# Altium PCB PCB.PcbDoc
Units mm, origin at the board's own origin, x right, y up, seen from the top; angles counter-clockwise.
Board outline 83.19 x 64.96 mm, 2 copper layers (Top Layer, Bottom Layer); 13 components, 33 nets, 346 pads, 36 vias.
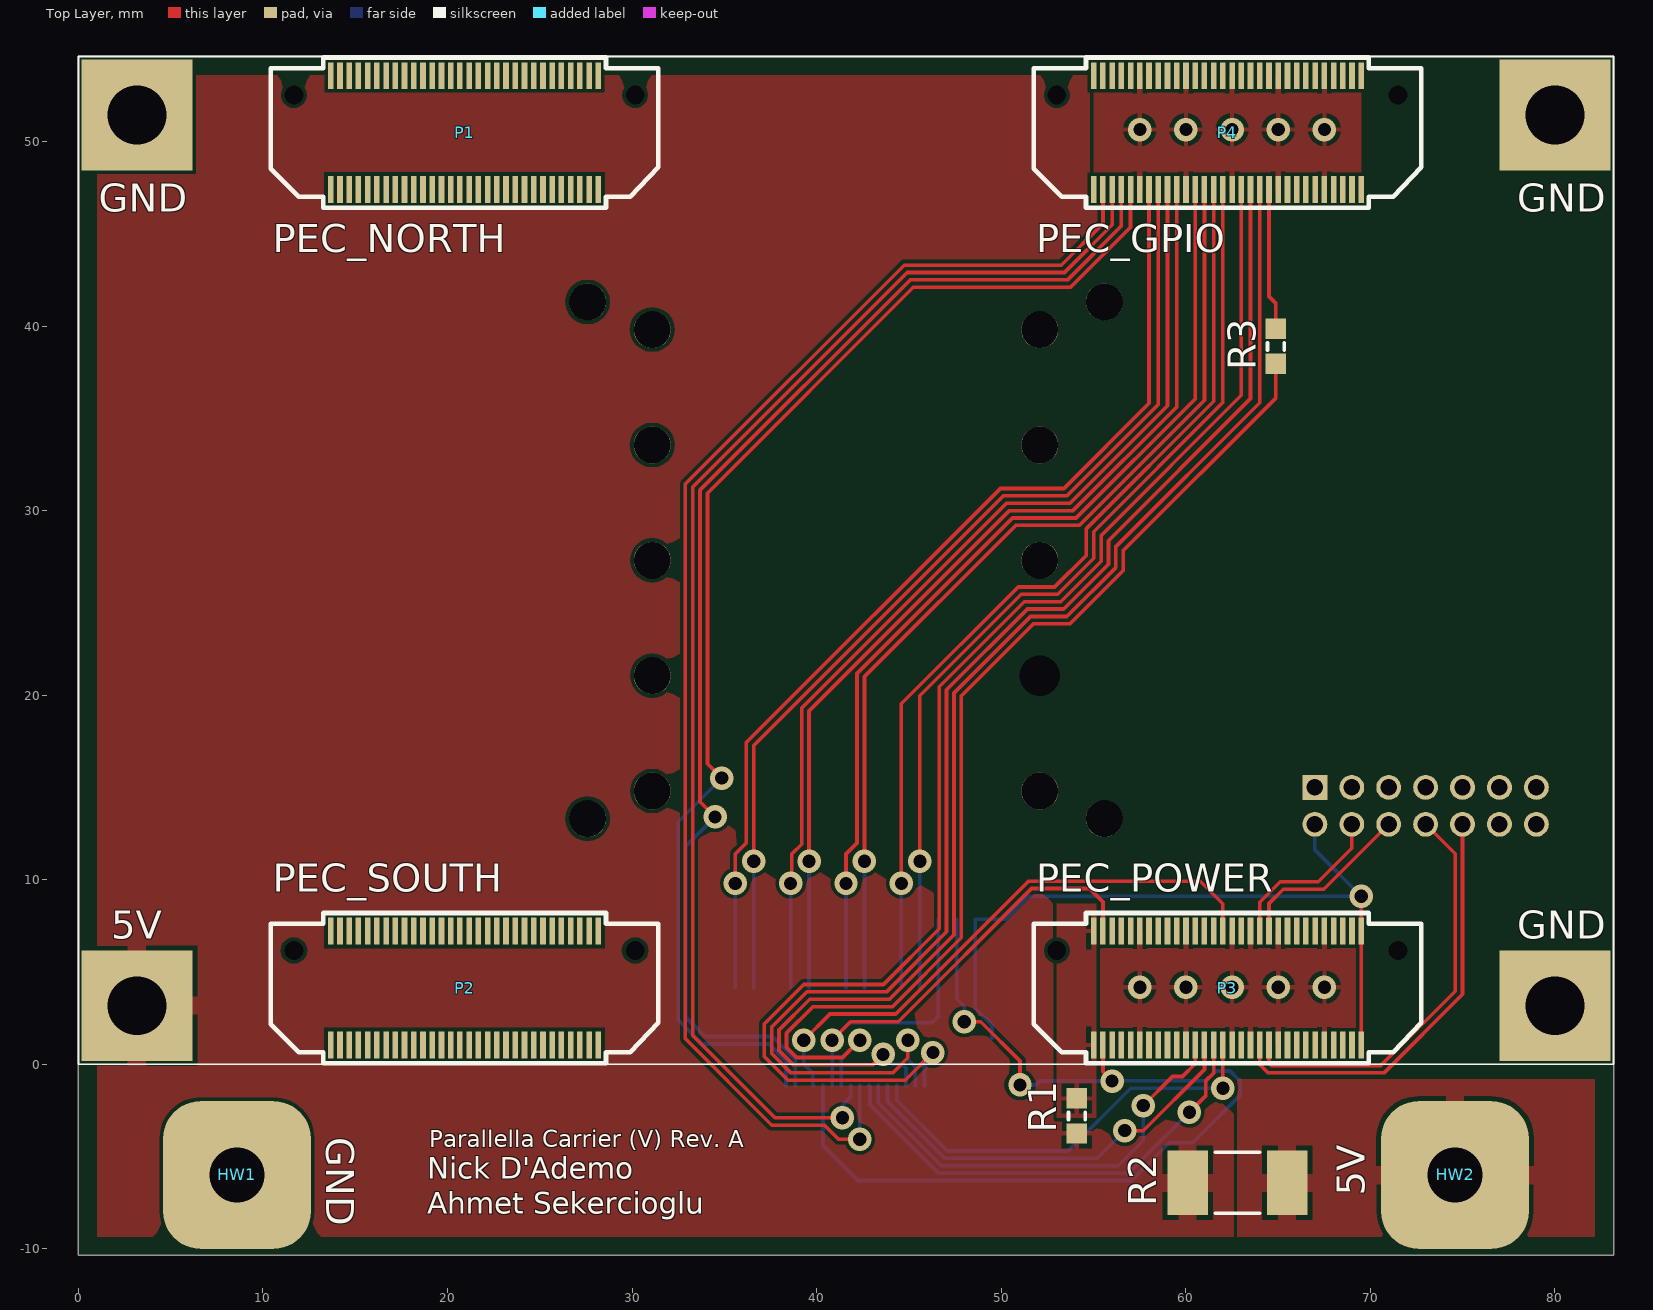
[diagram p0: Top Layer view]
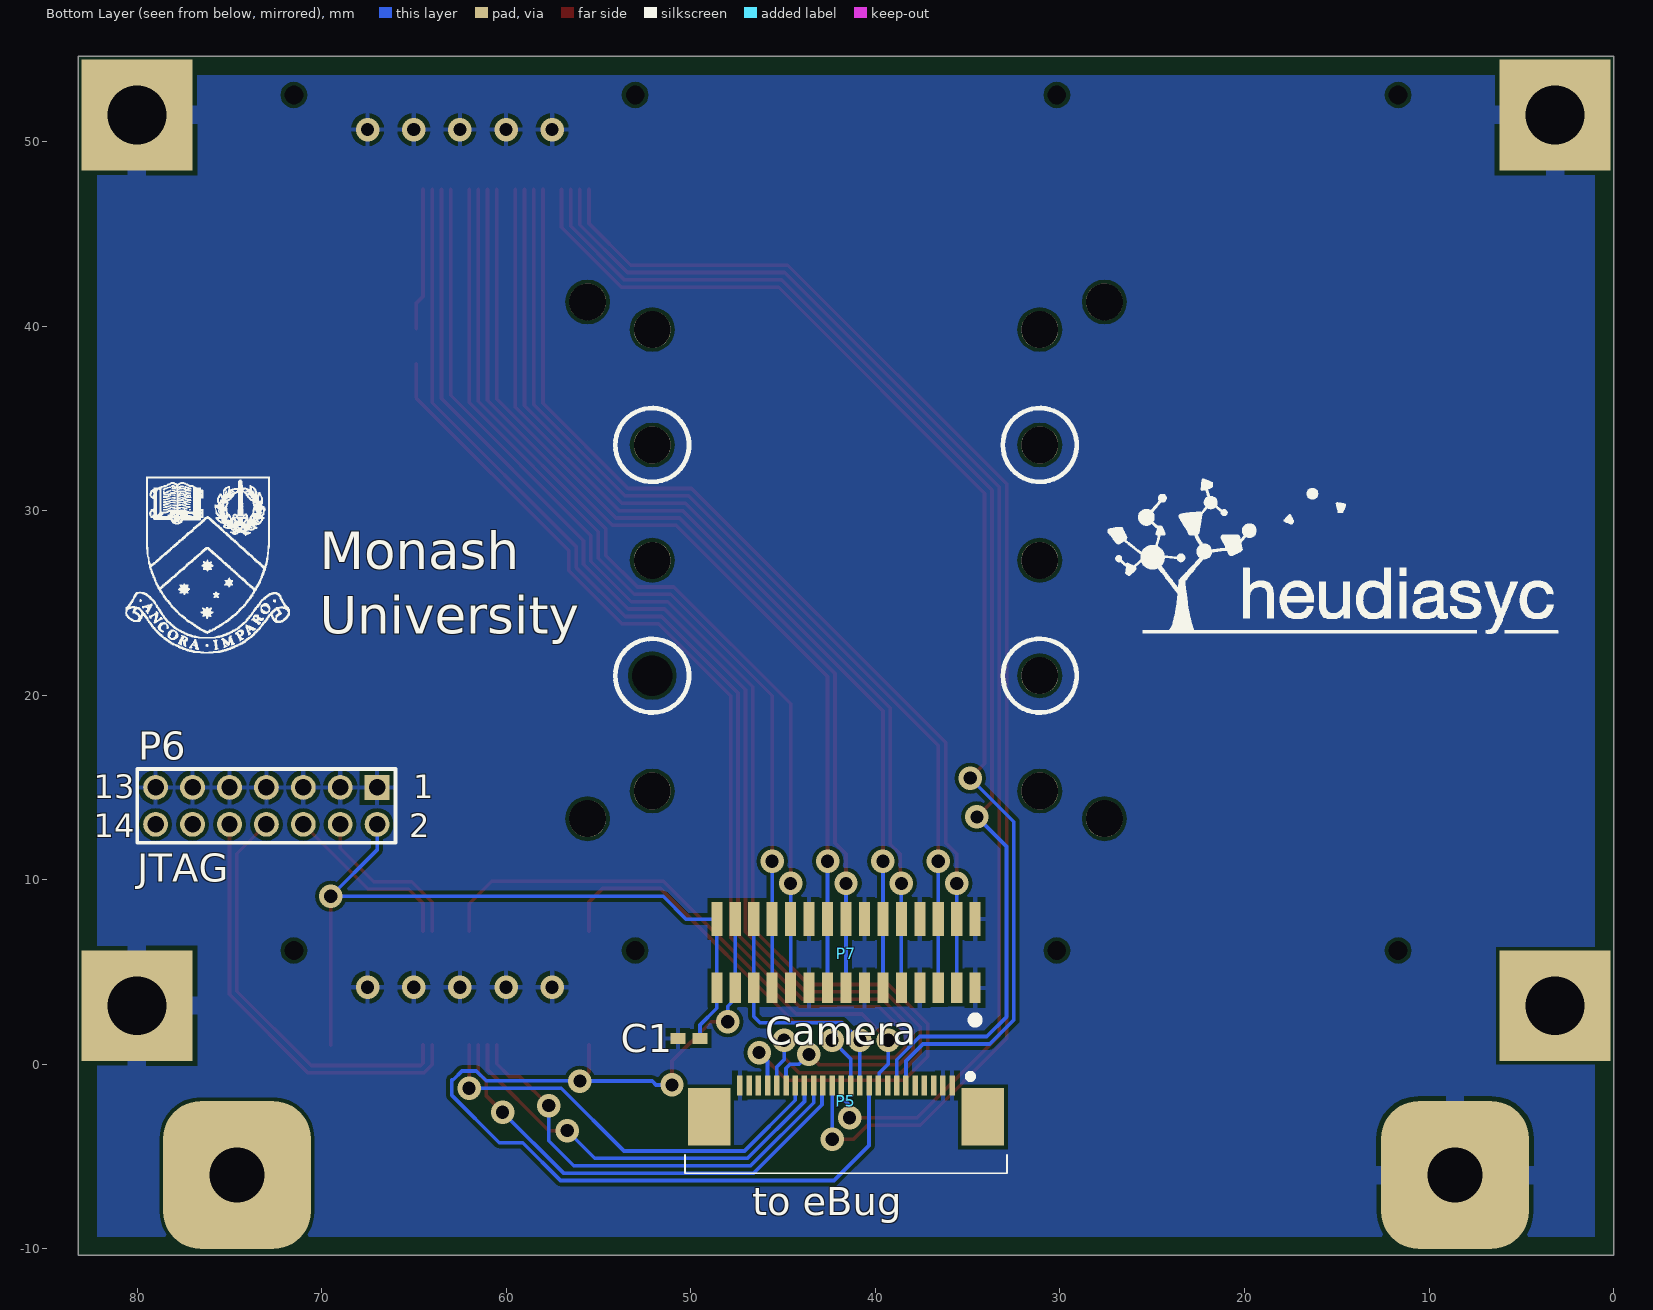
[diagram p1: Bottom Layer view, seen from below]
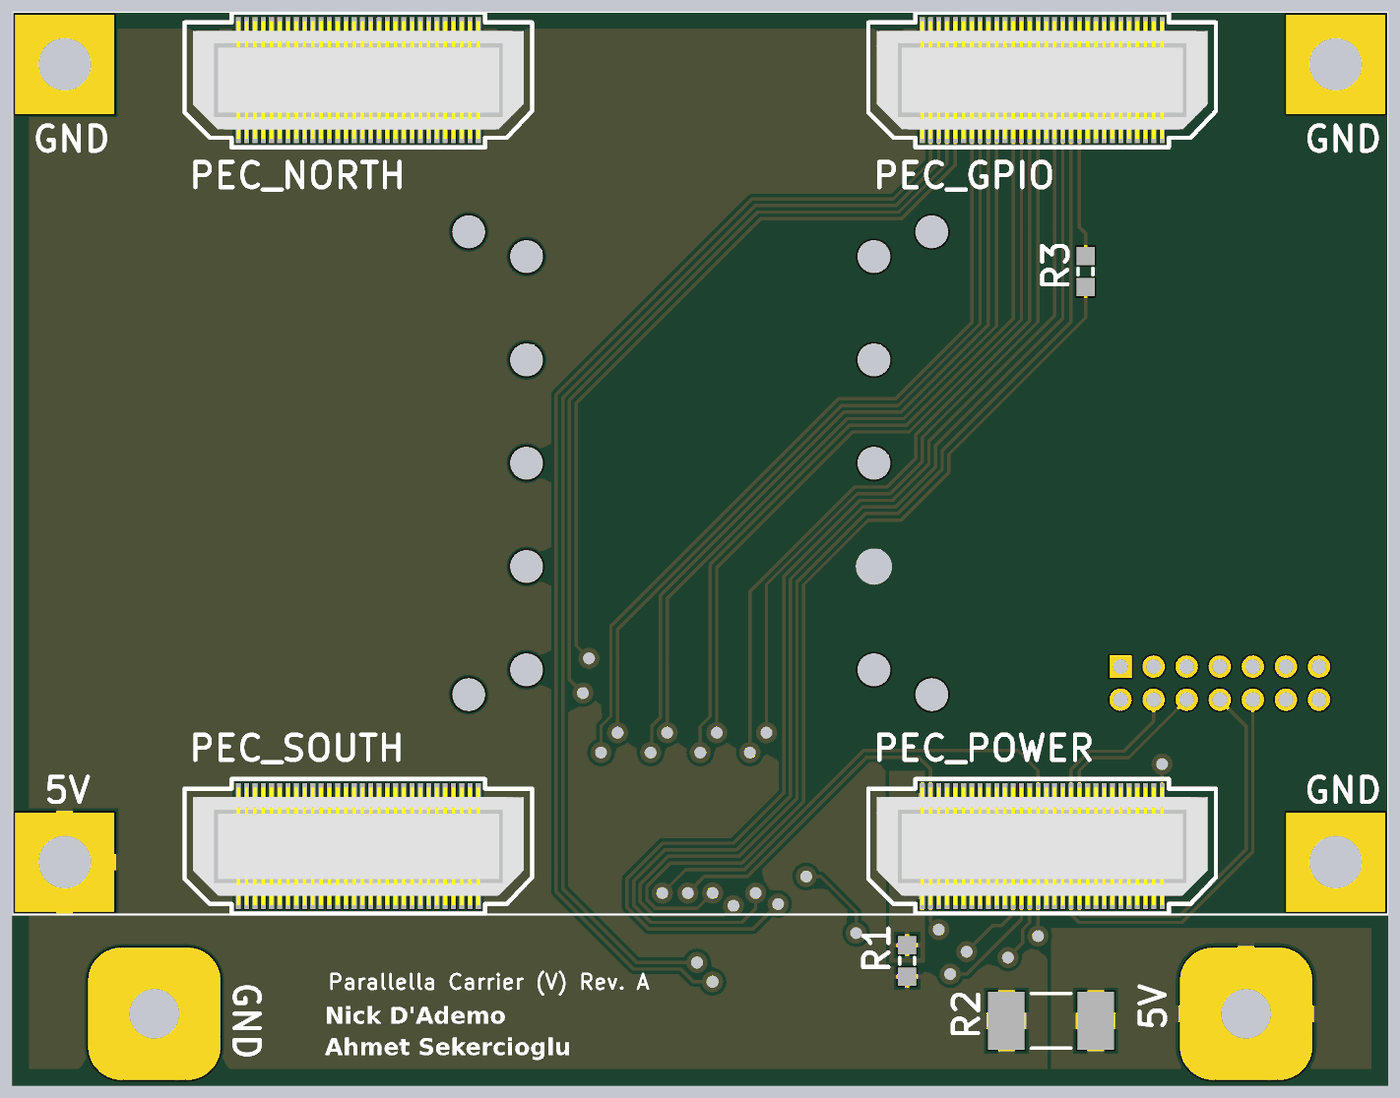
[diagram p2: 3D render of the assembled board from above, using the file's embedded part models]

## Layer stack, top to bottom
Top Solder: solder mask 0.0102, Solder Resist, Dk 3.5
Top Layer: signal copper 0.0356
Dielectric 1: dielectric 0.32, FR-4, Dk 4.8
Bottom Layer: signal copper 0.0356
Bottom Solder: solder mask 0.0102, Solder Resist, Dk 3.5

## Board outline
0,-10.35 0,54.61 83.185,54.61 83.185,-10.35

## Design rules (kind name [scope] priority, off if disabled: settings)
BoardOutlineClearance [IsPolygon] p1: gap=1
Clearance Clearance_1 [HasFootprint('BTH-030-01-F-D-A') vs HasFootprint('BTH-030-01-F-D-A')] p1: gap=0.1
Clearance [All] p2: gap=0.2
DiffPairsRouting [All] p1: maxlimit=0.2 minlimit=0.2 mostfreqgap=0.2 toplayer_minwidth=0.2 toplayer_maxwidth=0.2 toplayer_prefwidth=0.2 bottomlayer_minwidth=0.2 bottomlayer_maxwidth=0.2 bottomlayer_prefwidth=0.2 maxuncoupledlength=12.7
HoleSize [All] p1: absolutevalues=TRUE maxlimit=3.175 minlimit=0.025 maxpercent=80.000 minpercent=20.000
MinimumSolderMaskSliver [All] p1: minsoldermaskwidth=0
PolygonConnect PolygonConnect_5V_Hole [IsPadHoleValid vs InNet('5V')] p1: connectstyle=Relief reliefconductorwidth=1 reliefentries=4 polygonreliefangle="90 Angle" airgapwidth=0.254
PolygonConnect PolygonConnect_5V_SENSE [All vs InNet('5V_SENSE')] p2: connectstyle=Relief reliefconductorwidth=1 reliefentries=4 polygonreliefangle="90 Angle" airgapwidth=0.254
PolygonConnect PolygonConnect_5V_RES [HasFootprint('RESC6432M') vs InNet('5V')] p3: connectstyle=Relief reliefconductorwidth=1 reliefentries=4 polygonreliefangle="90 Angle" airgapwidth=0.254
PolygonConnect PolygonConnect_GND_Hole [IsPadHoleValid AND NOT HasFootprint('2x7H_2mm') vs InNet('GND')] p4: connectstyle=Relief reliefconductorwidth=1 reliefentries=4 polygonreliefangle="90 Angle" airgapwidth=0.254
PolygonConnect [All] p5: connectstyle=Relief reliefconductorwidth=0.254 reliefentries=4 polygonreliefangle="90 Angle" airgapwidth=0.254
RoutingVias [All] p1: holewidth=0.711 width=1.27 viastyle="Through Hole" minholewidth=0.711 minwidth=1.27 maxholewidth=0.711 maxwidth=1.27
SilkToSilkClearance [All] p1: silktosilkclearance=0
SilkToSolderMaskClearance [IsPad] p1: minsilkscreentomaskgap=0 clearancetoexposedcopper=TRUE
SolderMaskExpansion [All] p1: expansion=0.102
Width [All] p1: maxlimit=0.2 minlimit=0.2 preferedwidth=0.2
25 further rules are at their usual default settings.

## Classes and differential pairs
differential pair D1: +D1_P -D1_N
differential pair D0: +D0_P -D0_N
differential pair C: +C_P -C_N

## Components (designator, comment, footprint, x,y, rotation, side; value= is the part's Value field where it differs from the comment)
C1 "Cap" CAPC1005N 50.1,1.4 r180 bottom
HW1 "7790_PAD" 7790_PAD 8.592,-6 r0 top locked
HW2 "7790_PAD" 7790_PAD 74.593,-6 r0 top locked
P1 "PEC_NORTH" BTH-030-01-F-D-A 20.922,50.482 r0 top locked
P2 "PEC_SOUTH" BTH-030-01-F-D-A 20.922,4.128 r0 top locked
P3 "PEC_POWER" BTH-030-01-F-D-A 62.263,4.128 r0 top locked
P4 "PEC_GPIO" BTH-030-01-F-D-A 62.263,50.482 r0 top locked
P5 "eBug" 2-1734592-4_MIRRORED 41.593,-2 r180 bottom
P6 "JTAG" 2x7H_2mm 67,15 r0 bottom locked
P7 "Camera" 1-1734248-5 41.593,6 r180 bottom locked
R1 "Jumper Resistor" RESC1608M 54.1,-2.8 r90 top
R2 "Current Sense Resistor" RESC6432M 62.8,-6.427 r0 top
R3 "Jumper Resistor" RESC1608M 64.886,38.9 r90 top

## Footprints (in the part's own frame and the unit in brackets; to place one, negate y for a bottom-side part, rotate by r counter-clockwise, add the part's x,y. Pads: shape width x height; smd on the part's side, far side on the other; paste and mask are expansions set on the pad)
1-1734248-5 [mm]
  rect 0.6x1.65 smd: 1(7,-1.862) 2(6,-1.862) 3(5,-1.862) 4(4,-1.862) 5(3,-1.862) 6(2,-1.862) 7(1,-1.862) 8(0,-1.862) 9(-1,-1.862) 10(-2,-1.862) 11(-3,-1.862) 12(-4,-1.862) 13(-5,-1.862) 14(-6,-1.862) 15(-7,-1.862)
  rect 0.6x1.85 smd: 1(7,1.863) 2(6,1.863) 3(5,1.863) 4(4,1.863) 5(3,1.863) 6(2,1.863) 7(1,1.863) 8(0,1.863) 9(-1,1.863) 10(-2,1.863) 11(-3,1.863) 12(-4,1.863) 13(-5,1.863) 14(-6,1.863) 15(-7,1.863)
  silkscreen extent 6.84,-3.76 7.16,-3.44, body extent -11.2,-2.34 11.2,2.51, height 5.69
2-1734592-4_MIRRORED [mm]
  rect 2.3x3.1 smd: 0(-7.42,-0.85) 0(7.42,-0.85)
  rect 0.3x1.1 smd: 1(5.75,0.85) 2(5.25,0.85) 3(4.75,0.85) 4(4.25,0.85) 5(3.75,0.85) 6(3.25,0.85) 7(2.75,0.85) 8(2.25,0.85) 9(1.75,0.85) 10(1.25,0.85) 11(0.75,0.85) 12(0.25,0.85) 13(-0.25,0.85) 14(-0.75,0.85) 15(-1.25,0.85) 16(-1.75,0.85) 17(-2.25,0.85) 18(-2.75,0.85) 19(-3.25,0.85) 20(-3.75,0.85) 21(-4.25,0.85) 22(-4.75,0.85) 23(-5.25,0.85) 24(-5.75,0.85)
  silkscreen extent -8.72,-3.91 8.71,1.49, body extent -8.72,-3.91 8.71,1.2, height 2.06
2x7H_2mm [mil]
  rect 53x53 hole 35: 1(0,0)
  round 53 hole 35: 2(0,78.74) 3(78.74,0) 4(78.74,78.74) 5(157.48,0) 6(157.48,78.74) 7(236.22,0) 8(236.22,78.74) 9(314.96,0) 10(314.96,78.74) 11(393.7,0) 12(393.7,78.74) 13(472.44,0) 14(472.44,78.74)
  silkscreen extent -39,-39 512,118
7790_PAD [mm]
  rrect50% 8x8 hole 3: 1(0,0)
BTH-030-01-F-D-A [mm]
  rect 0.305x1.448 smd mask+0.05: 1(-7.25,3.086) 2(-7.25,-3.086) 3(-6.75,3.086) 4(-6.75,-3.086) 5(-6.25,3.086) 6(-6.25,-3.086) 7(-5.75,3.086) 8(-5.75,-3.086) 9(-5.25,3.086) 10(-5.25,-3.086) 11(-4.75,3.086) 12(-4.75,-3.086) 13(-4.25,3.086) 14(-4.25,-3.086) 15(-3.75,3.086) 16(-3.75,-3.086) 17(-3.25,3.086) 18(-3.25,-3.086) 19(-2.75,3.086) 20(-2.75,-3.086) 21(-2.25,3.086) 22(-2.25,-3.086) 23(-1.75,3.086) 24(-1.75,-3.086) 25(-1.25,3.086) 26(-1.25,-3.086) 27(-0.75,3.086) 28(-0.75,-3.086) 29(-0.25,3.086) 30(-0.25,-3.086) 31(0.25,3.086) 32(0.25,-3.086) 33(0.75,3.086) 34(0.75,-3.086) 35(1.25,3.086) 36(1.25,-3.086) 37(1.75,3.086) 38(1.75,-3.086) 39(2.25,3.086) 40(2.25,-3.086) 41(2.75,3.086) 42(2.75,-3.086) 43(3.25,3.086) 44(3.25,-3.086) 45(3.75,3.086) 46(3.75,-3.086) 47(4.25,3.086) 48(4.25,-3.086) 49(4.75,3.086) 50(4.75,-3.086) 51(5.25,3.086) 52(5.25,-3.086) 53(5.75,3.086) 54(5.75,-3.086) 55(6.25,3.086) 56(6.25,-3.086) 57(6.75,3.086) 58(6.75,-3.086) 59(7.25,3.086) 60(7.25,-3.086)
  round 0.6 hole 1.016 unplated mask+0.458: 61(-9.246,2.032) 62(9.246,2.032)
  silkscreen extent -10.5,-4.07 10.5,4.07, body extent -10,-3.56 10,3.56, height 4.27
CAPC1005N [mm] "Chip Capacitor, Body 1.0x0.5mm, IPC Medium Density"
  rect 0.8x0.6 smd: 1(-0.6,0) 2(0.6,0)
  body extent -0.55,-0.3 0.55,0.3, height 0.6
RESC1608M [mm] "Chip Resistor, Body 1.6x0.8mm, IPC Low Density"
  rect 1.1x1.1 smd: 1(-0.95,0) 2(0.95,0)
  silkscreen extent -0.2,-0.45 0.2,0.45, body extent -0.85,-0.48 0.85,0.48, height 0.6
RESC6432M [mm] "Chip Resistor, Body 6.4x3.2mm, IPC Low Density"
  rect 2.2x3.5 smd: 1(-2.7,0) 2(2.7,0)
  silkscreen extent -1.2,-1.65 1.2,1.65, body extent -3.3,-1.7 3.3,1.7, height 1.2

## Part data
C1: "Capacitor, X7R, ±10%, 16V, 0402"
P1 P2 P3 P4: library part BTH-030-01-F-D-A, "SAMTEC - BTH-030-01-F-D-A - Conn Micro Terminal HDR 60 POS 0.5mm"
P5: library part "Header 24", "TE CONNECTIVITY - 2-1734592-4 - CONN FPC BOTTOM 24POS 0.50MM R/A"
P6: library part "Header 7X2", "Header, 7-Pin, Dual row"
P7: library part "Header 15", "TE CONNECTIVITY - 1-1734248-5 - 15 Position FPC Connector Contacts, Vertical, 1 Sided 0.039\" (1.00mm) Surface Mount"
R1 R3: library part Res1, "Resistor, ±1%, 0.1W, 0603"
R2: library part Res1, "BOURNS - CRL2512-FU-R010ELF - Surface Mount Thick Film Resistor, CRL Series, 0.01 ohm, 1 W, ± 1%, 2512 [6432 Metric]"

## Free pads (board coordinates)
  rect 6x6 hole 3.175: 0(3.175,3.175) 0(3.175,51.435) 0(80.01,3.175) 0(80.01,51.435)
  round 2 hole 2 unplated: 0(27.593,13.305) 0(27.593,41.305) 0(31.093,21.055) 0(31.093,33.555) 0(31.093,39.805) 0(31.093,14.805) 0(31.093,27.305) 0(52.092,14.805) 0(52.092,27.305) 0(52.092,39.805) 0(52.092,33.555) 0(55.592,13.305) 0(55.592,41.305)
  round 2 hole 2.2 unplated: 0(52.092,21.055)

## Via types
v1: diameter 1.27, hole 0.711, Top Layer to Bottom Layer, tented both sides, 36 vias

## Nets (pads, with @x,y where several pads share a name; then routed paths per layer and width w, separated by ;. In a path a pad name is that pad's centre, name@x,y a point inside that pad or via, vN(x,y) a via of type N, cw(c..) or ccw(c..) an arc to the next point about the centre after c; other vN are vias at no path point)
3P3V: C1.2 P3.59 P3.60 P6.2 P7.15 | length 41.3
  Top Layer w0.2: P3.60 P3.59 v1(69.513,9.1)
  Bottom Layer w0.2: C1.2 49.5,2.132 48.592,3.039 48.592,4.138 48.592,7.863 50.263,7.863 51.5,9.1 v1(69.513,9.1) 67,11.613 P6.2
5V: pad.0@3.175,3.175 R1.1 R2.1
5V_PEC: P3.1 P3.2 R1.2
5V_SENSE: HW2.1 R2.2
C_N: P4.24 P7.8 | length 53.1
  Top Layer w0.2: v1(41.592,9.8) 41.592,11.392 42.192,11.993 42.192,21.17 50.621,29.599 54.061,29.599 60.513,36.05 P4.24
  Bottom Layer w0.2: P7.8@41.592,4.138 41.592,7.863 v1(41.592,9.8)
C_P: P4.26 P7.9 | length 52.9
  Top Layer w0.2: v1(42.592,11) 42.592,21.004 50.787,29.199 54.227,29.199 61.013,35.985 P4.26
  Bottom Layer w0.2: P7.9@42.592,4.138 42.592,7.863 v1(42.592,11)
CLK: P4.30 P7.12 | length 51.2
  Top Layer w0.2: v1(45.592,11) 45.592,19.967 51.09,25.465 53.062,25.465 55.017,27.419 55.017,28.858 62.013,35.853 P4.30
  Bottom Layer w0.2: P7.12@45.592,4.138 45.592,7.863 v1(45.592,11)
D0_N: P4.14 P7.2 | length 54.6
  Top Layer w0.2: v1(35.592,9.8) 35.592,11.392 36.193,11.992 36.193,17.433 49.958,31.199 53.399,31.199 58.013,35.813 P4.14
  Bottom Layer w0.2: P7.2@35.592,4.138 35.592,7.863 v1(35.592,9.8)
D0_P: P4.16 P7.3 | length 54.4
  Top Layer w0.2: v1(36.592,11) 36.592,17.267 50.124,30.799 53.564,30.799 58.513,35.747 P4.16
  Bottom Layer w0.2: P7.3@36.592,4.138 36.592,7.863 v1(36.592,11)
D1_N: P4.18 P7.5 | length 53.7
  Top Layer w0.2: v1(38.592,9.8) 38.657,9.865 38.657,11.387 39.192,11.922 39.192,19.301 50.29,30.399 53.73,30.399 59.013,35.682 P4.18
  Bottom Layer w0.2: P7.5@38.592,4.138 38.592,7.863 v1(38.592,9.8)
D1_P: P4.20 P7.6 | length 53.5
  Top Layer w0.2: v1(39.592,11) 39.592,19.136 50.455,29.999 53.896,29.999 59.513,35.616 P4.20
  Bottom Layer w0.2: P7.6@39.592,4.138 39.592,7.863 v1(39.592,11)
GND: C1.1 HW1.1 P3.11 P3.12 P3.21 P3.22 P3.31 P3.32 P3.35 P3.36 P3.41 P3.42 P3.51 P3.52 P4.11 P4.12 P4.21 P4.22 P4.31 P4.32 P4.41 P4.42 P4.51 P4.52 P5.1 P5.2 P5.24 P6.1 P6.3 P6.5 P6.7 P6.9 P6.11 P6.13 P7.1 P7.4 P7.7 P7.10 pad.0@3.175,51.435 pad.0@80.01,3.175 pad.0@80.01,51.435
  other v1: 57.513,4.175 60.013,4.175 62.513,4.175 65.013,4.175 67.513,4.175 57.513,50.647 60.013,50.647 62.513,50.647 65.013,50.647 67.513,50.647
GPIO: P4.28 P7.11 | length 51.4
  Top Layer w0.2: v1(44.592,9.8) 44.592,19.532 50.925,25.865 52.897,25.865 54.617,27.585 54.617,29.023 61.513,35.919 P4.28
  Bottom Layer w0.2: P7.11@44.592,4.138 44.592,7.863 v1(44.592,9.8)
JTAG_TCK: P3.39 P6.6 | length 9.8
  Top Layer w0.2: P3.39 64.513,8.707 65.287,9.481 67.481,9.481 P6.6
JTAG_TDI: P3.38 P6.10 | length 23.2
  Top Layer w0.2: P3.38 64.013,-0.013 64.469,-0.469 70.74,-0.469 75,3.791 P6.10
JTAG_TDO: P3.40 P6.8 | length 22.5
  Top Layer w0.2: P3.40 64.513,0.053 64.635,-0.069 70.574,-0.069 74.6,3.957 74.6,11.4 P6.8
JTAG_TMS: P3.37 P6.4 | length 9.1
  Top Layer w0.2: P3.37 64.013,8.773 65.122,9.882 67.182,9.882 69,11.7 P6.4
P13_3: P4.10 P5.6 | length 68.9
  Top Layer w0.2: v1(34.863,15.5) 34.083,16.28 34.083,30.943 45.24,42.1 53.759,42.1 57.013,45.354 P4.10
  Bottom Layer w0.2: v1(34.863,15.5) 32.5,13.137 32.5,2.4 33.8,1.1 37.424,1.1 38.343,0.182 P5.6
P13_4: P4.8 P5.7 | length 68.6
  Top Layer w0.2: v1(34.5,13.4) 33.683,14.217 33.683,31.109 45.074,42.5 53.593,42.5 56.513,45.42 P4.8
  Bottom Layer w0.2: v1(34.5,13.4) 32.9,11.8 32.9,2.565 33.965,1.5 37.59,1.5 38.843,0.247 P5.7
P13_6: P3.29 P5.9 | length 30.9
  Top Layer w0.2: v1(39.3,1.3) 40.721,2.721 44.282,2.721 51.482,9.921 60.79,9.921 62.013,8.698 P3.29
  Bottom Layer w0.2: v1(39.3,1.3) 39.3,0.017 39.793,-0.476 39.793,-1.1 P5.9
P13_7: P3.4 P5.10 P7.14 | length 54.9
  Top Layer w0.2: v1(48,2.3) 48.9,2.3 51.021,0.179 v1(51.021,-1.121) ; P3.4 55.513,-0.413 v1(56.013,-0.913)
  Bottom Layer w0.2: P5.10 40.343,-4.398 42.245,-6.3 57.066,-6.3 59.113,-4.253 60.382,-4.253 62.948,-1.687 62.948,-0.844 62.879,-0.844 62.4,-0.365 61.626,-0.365 61.091,-0.9 56.026,-0.9 v1(56.013,-0.913) 52.092,-0.913 51.884,-1.121 v1(51.021,-1.121) ; P7.14@47.592,7.863 47.592,4.138 47.592,3.55 48,3.142 v1(48,2.3)
P13_8: P3.3 P5.11 P7.13 | length 34.3
  Top Layer w0.2: v1@40.843,1.279 v1(40.843,1.3) 41.843,2.3 44.426,2.3 51.647,9.521 54.783,9.521 55.513,8.791 P3.3
  Bottom Layer w0.2: P5.11 v1@40.843,1.182 ; v1@41.06,1.4 v1@40.843,1.182 ; P7.13@46.592,7.863 46.592,4.138 46.592,2.592 46.252,2.252 41.795,2.252 v1(40.843,1.3) v1@40.843,1.182
P13_9: P5.12 R3.1 | length 59.2
  Top Layer w0.2: v1(42.343,1.3) 41.408,0.365 38.913,0.365 38.365,0.913 38.365,1.687 39.799,3.121 44.116,3.121 47.843,6.848 47.843,19.954 51.753,23.865 53.725,23.865 56.617,26.757 56.617,27.837 64.886,36.106 R3.1
  Bottom Layer w0.2: P5.12 41.343,0.3 v1(42.343,1.3)
P14_3: P4.6 P5.13 | length 72.1
  Top Layer w0.2: v1(41.4,-2.9) 37.74,-2.9 33.283,1.557 33.283,31.275 44.908,42.9 53.428,42.9 56.013,45.485 P4.6
  Bottom Layer w0.2: v1(41.4,-2.9) 41.4,-2.217 41.843,-1.774 P5.13
P14_4: P4.4 P5.14 | length 75
  Top Layer w0.2: v1(42.335,-4.065) 41.189,-4.065 40.424,-3.3 37.575,-3.3 32.883,1.392 32.883,31.44 44.743,43.3 53.262,43.3 55.513,45.551 P4.4
  Bottom Layer w0.2: v1(42.335,-4.065) 42.335,-1.158 P5.14
P14_5: P3.28 P5.15 | length 25.5
  Top Layer w0.2: v1(60.2,-2.6) 61.078,-1.722 61.078,-0.913 61.513,-0.478 P3.28
  Bottom Layer w0.2: P5.15 42.893,-1.2 42.893,-2.197 46.595,-5.9 56.9,-5.9 v1(60.2,-2.6)
P14_6: P3.24 P5.16 | length 23.9
  Top Layer w0.2: v1(57.7,-2.244) 59.284,-0.66 59.825,-0.66 60.513,0.028 P3.24
  Bottom Layer w0.2: P5.16 43.343,-2.081 46.761,-5.5 56.348,-5.5 57.7,-4.148 v1(57.7,-2.244)
P14_7: P3.26 P5.17 | length 22.6
  Top Layer w0.2: v1(56.7,-3.6) 57.7,-3.6 61.013,-0.287 P3.26
  Bottom Layer w0.2: P5.17 43.843,-2.016 46.927,-5.1 55.2,-5.1 v1(56.7,-3.6)
P14_8: P3.30 P5.18 | length 23.4
  Top Layer w0.2: v1(62.013,-1.3) P3.30
  Bottom Layer w0.2: P5.18 44.343,-1.95 47.093,-4.7 53.625,-4.7 57.025,-1.3 v1(62.013,-1.3)
P14_9: P4.38 P5.19 | length 69.8
  Top Layer w0.2: v1(43.6,0.534) 43.031,-0.035 38.747,-0.035 37.965,0.747 37.965,1.853 39.633,3.521 43.95,3.521 47.443,7.014 47.443,20.12 51.587,24.265 53.56,24.265 56.217,26.922 56.217,28.054 64.013,35.849 P4.38
  Bottom Layer w0.2: v1(43.6,0.534) 44.134,0 44.631,0 44.843,-0.211 P5.19
P14_10: P4.36 P5.20 | length 73
  Top Layer w0.2: v1(44.943,1.3) 44.943,0.35 44.125,-0.469 38.615,-0.469 37.565,0.581 37.565,2.019 39.467,3.921 43.785,3.921 47.043,7.179 47.043,20.286 51.422,24.665 53.394,24.665 55.817,27.088 55.817,28.371 63.513,36.066 P4.36
  Bottom Layer w0.2: v1(44.943,1.3) 44.943,0.254 45.343,-0.146 P5.20
P14_11: P4.34 P5.21 | length 73.6
  Top Layer w0.2: v1(46.3,0.634) 44.797,-0.869 38.45,-0.869 37.165,0.416 37.165,2.184 39.302,4.321 43.619,4.321 46.643,7.345 46.643,20.451 51.256,25.065 53.228,25.065 55.417,27.254 55.417,28.65 63.013,36.245 P4.34
  Bottom Layer w0.2: P5.21 45.843,0.177 v1(46.3,0.634)
XRES: P4.40 R3.2 | length 7.7
  Top Layer w0.2: P4.40 64.513,41.594 64.886,41.221 R3.2
pads on no net: P1.1 P1.2 P1.3 P1.4 P1.5 P1.6 P1.7 P1.8 P1.9 P1.10 P1.11 P1.12 P1.13 P1.14 P1.15 P1.16 P1.17 P1.18 P1.19 P1.20 P1.21 P1.22 P1.23 P1.24 P1.25 P1.26 P1.27 P1.28 P1.29 P1.30 P1.31 P1.32 P1.33 P1.34 P1.35 P1.36 P1.37 P1.38 P1.39 P1.40 P1.41 P1.42 P1.43 P1.44 P1.45 P1.46 P1.47 P1.48 P1.49 P1.50 P1.51 P1.52 P1.53 P1.54 P1.55 P1.56 P1.57 P1.58 P1.59 P1.60 P1.61 P1.62 P2.1 P2.2 P2.3 P2.4 P2.5 P2.6 P2.7 P2.8 P2.9 P2.10 P2.11 P2.12 P2.13 P2.14 P2.15 P2.16 P2.17 P2.18 P2.19 P2.20 P2.21 P2.22 P2.23 P2.24 P2.25 P2.26 P2.27 P2.28 P2.29 P2.30 P2.31 P2.32 P2.33 P2.34 P2.35 P2.36 P2.37 P2.38 P2.39 P2.40 P2.41 P2.42 P2.43 P2.44 P2.45 P2.46 P2.47 P2.48 P2.49 P2.50 P2.51 P2.52 P2.53 P2.54 P2.55 P2.56 P2.57 P2.58 P2.59 P2.60 P2.61 P2.62 P3.5 P3.6 P3.7 P3.8 P3.9 P3.10 P3.13 P3.14 P3.15 P3.16 P3.17 P3.18 P3.19 P3.20 P3.23 P3.25 P3.27 P3.33 P3.34 P3.43 P3.44 P3.45 P3.46 P3.47 P3.48 P3.49 P3.50 P3.53 P3.54 P3.55 P3.56 P3.57 P3.58 P3.61 P3.62 P4.1 P4.2 P4.3 P4.5 P4.7 P4.9 P4.13 P4.15 P4.17 P4.19 P4.23 P4.25 P4.27 P4.29 P4.33 P4.35 P4.37 P4.39 P4.43 P4.44 P4.45 P4.46 P4.47 P4.48 P4.49 P4.50 P4.53 P4.54 P4.55 P4.56 P4.57 P4.58 P4.59 P4.60 P4.61 P4.62 P5.0 P5.3 P5.4 P5.5 P5.8 P5.22 P5.23 P6.12 P6.14

## Polygon pours and split planes (outlines as drawn)
GND on Bottom Layer "Bottom Layer-GND" (solid, remove dead copper, pour order 13): 0,54.61 83.185,54.61 83.185,-10.35 0,-10.35 0,54.61
5V on Top Layer "Top Layer-5V" (solid, remove dead copper, pour order 18): 0,54.61 0,-10.35 83.185,-10.35 83.185,54.61 0,54.61
GND on Top Layer "Top Layer-GND_PEC_POWER" (solid, pour order 14): 55.013,7.214 69.513,7.214 69.513,1.042 55.013,1.042 55.013,7.214
GND on Top Layer "Top Layer-GND_PEC_GPIO" (solid, pour order 15): 55.013,53.568 69.513,53.568 69.513,47.396 55.013,47.396 55.013,53.568
5V_PEC on Top Layer "Top Layer-5V_PEC_POWER" (solid, pour order 12): 53.017,6.16 53.008,6.169 53.008,8.686 55.164,8.686 55.164,-2.91 53.02,-2.91
5V_SENSE on Top Layer "Top Layer-5V_SENSE" (solid, pour order 16): 65.461,-0.8 83.185,-0.8 83.185,-10.35 62.8,-10.35 62.8,-0.8

## Silkscreen, mask and mechanical layers (free items; w line width, h text height)
Top Overlay:
  lines w0.1: 0,0 0,54.61 83.185,54.61 83.185,0 0,0
  text "GND" at 1.096,46.2 h1.52
  text "GND" at 77.965,46.2 h1.52
  text "5V" at 1.788,6.8 h1.52
  text "GND" at 77.965,6.8 h1.52
  text "GND" at 13.427,-3.945 h1.52 r270
  text "Parallella Carrier (V) Rev. A" at 19,-4.5 h0.9
  text "Nick D'Ademo" at 18.9,-6.6 h2
  text "5V" at 69.692,-7.135 h1.52 r90
  text "Ahmet Sekercioglu" at 18.9,-8.5 h2
Bottom Overlay:
  drawing of 5610 lines, arcs and shapes, not listed
  text "Monash / University" at 70.1,22.639 h3.5
  text "to eBug" at 46.681,-8.172 h1.52
Mechanical 1:
  the board outline again, w0.1

## Text inside footprints (layer, text, board x,y; h text height)
P1: Mechanical 1 "J1" at 21.862,50.647 h0.76
P2: Mechanical 1 "J1" at 21.862,4.293 h0.76
P3: Mechanical 1 "J1" at 63.203,4.293 h0.76
P4: Mechanical 1 "J1" at 63.203,50.647 h0.76
P6: Bottom Overlay "13" at 82.354,14.4 h1.27; Bottom Overlay "14" at 82.354,12.3 h1.27; Bottom Overlay "1" at 65.054,14.4 h1.27; Bottom Overlay "2" at 65.254,12.3 h1.27